# EAGLE board DIA01-03 (EAGLE 9.7.0)

Size 169.61 x 96.9 mm. Coordinates in mm from the lower left corner, seen from the top.
Outline: 0,0 169.61,0 169.61,96.91 0,96.91 0,0
Copper layers (1*16): Top 0.035mm / dielectric 1.5mm / Bottom 0.035mm
Design rules "default": minimum track width 6mil, minimum drill 0.35mm, track to track 6mil, track to pad 6mil, pad to pad 6mil, via to via 6mil, smd to smd 6mil, copper to edge 40mil, drill to drill 6mil, minimum pad ring 10mil, minimum via ring 8mil, stop-mask expansion 4mil, vias tented up to drill 0mil, thermal gap 10mil

## Footprints (pad centres in the part's own frame; a part is rotated, then mirrored left to right if it is on the bottom)
GL5528 = drill 0.8 pad 1.4: 1 -1.702,0; 2 1.702,0
RESAD1016W63L850D250B = drill 0.83 pad 1.43: 1 -5.08,0; 2 5.08,0
JHD-162A = drill 1.016 long: 1 -19.05,0; 2 -16.51,0; 3 -13.97,0; 4 -11.43,0; 5 -8.89,0; 6 -6.35,0; 7 -3.81,0; 8 -1.27,0; 9 1.27,0; 10 3.81,0; 11 6.35,0; 12 8.89,0; 13 11.43,0; 14 13.97,0; 15 16.51,0; 16 19.05,0
ARDUINO-UNO-R3-SHIELD = drill 1.016 pad 1.88: 3.3V 24.13,-2.54; 5V 24.13,0; A0 24.13,12.7; A1 24.13,15.24; A2 24.13,17.78; A3 24.13,20.32; A4 24.13,22.86; A5 24.13,25.4; AREF -24.13,-13.97; D2 -24.13,20.32; D3 -24.13,17.78; D4 -24.13,15.24; D5 -24.13,12.7; D6 -24.13,10.16; D7 -24.13,7.62; D8 -24.13,3.81; D9 -24.13,1.27; D10 -24.13,-1.27; D11 -24.13,-3.81; D12 -24.13,-6.35; D13 -24.13,-8.89; GND@0 24.13,2.54; GND@1 24.13,5.08; GND@2 -24.13,-11.43; IOREF 24.13,-7.62; NC 24.13,-10.16; RES 24.13,-5.08; RX -24.13,25.4; SCL -24.13,-19.05; SDA -24.13,-16.51; TX -24.13,22.86; VIN 24.13,7.62

## Placement (x,y rotation side)
RFOTO  PHOTOCELL_GL5528  [GL5528]  139.38,62.52 0 top
RR0  220  [RESAD1016W63L850D250B]  130.49,41.58 90 top
RR1  10k  [RESAD1016W63L850D250B]  138.11,49.82 270 top
ULCD  LCD-16X2JHD-162A  [JHD-162A]  113.98,36.63 0 top
UUNO  ARDUINO-UNO-R3-SHIELD  [ARDUINO-UNO-R3-SHIELD]  47.88,67.06 270 top

## Library data of the parts
RFOTO RR0 RR1 ULCD UUNO = Tinkercad

## Nets
ULCD_LED+: RR0.1 ULCD.15
UUNO_5V: RFOTO.2 ULCD.2 UUNO.5V
UUNO_A0: RFOTO.1 RR1.1 UUNO.A0
UUNO_D2: ULCD.14 UUNO.D2
UUNO_D3: ULCD.13 UUNO.D3
UUNO_D4: ULCD.12 UUNO.D4
UUNO_D5: ULCD.11 UUNO.D5
UUNO_D9: RR0.2 UUNO.D9
UUNO_D11: ULCD.6 UUNO.D11
UUNO_D12: ULCD.4 UUNO.D12
UUNO_GND: RR1.2 ULCD.1 ULCD.3 ULCD.5 ULCD.16 UUNO.GND@0 UUNO.GND@1 UUNO.GND@2

## Tracks (layer width: path | path; a pad name or v marks a point on that pad's centre or on a via)
ULCD_LED+  (1 unrouted)
UUNO_5V  (2 unrouted)
UUNO_A0  (2 unrouted)
UUNO_D2  (1 unrouted)
UUNO_D3  (1 unrouted)
UUNO_D4  (1 unrouted)
UUNO_D5  (1 unrouted)
UUNO_D9  (1 unrouted)
UUNO_D11  (1 unrouted)
UUNO_D12  (1 unrouted)
UUNO_GND  (7 unrouted)